# Altium PCB Yboard.pcbdoc (part 2 of 2)
Units mil, origin at the board's own origin, x right, y up, seen from the top; angles counter-clockwise.
Board outline 6804.08 x 4580.91 mil, 2 copper layers (Top Layer, Bottom Layer); 74 components, 99 nets, 390 pads, 148 vias.
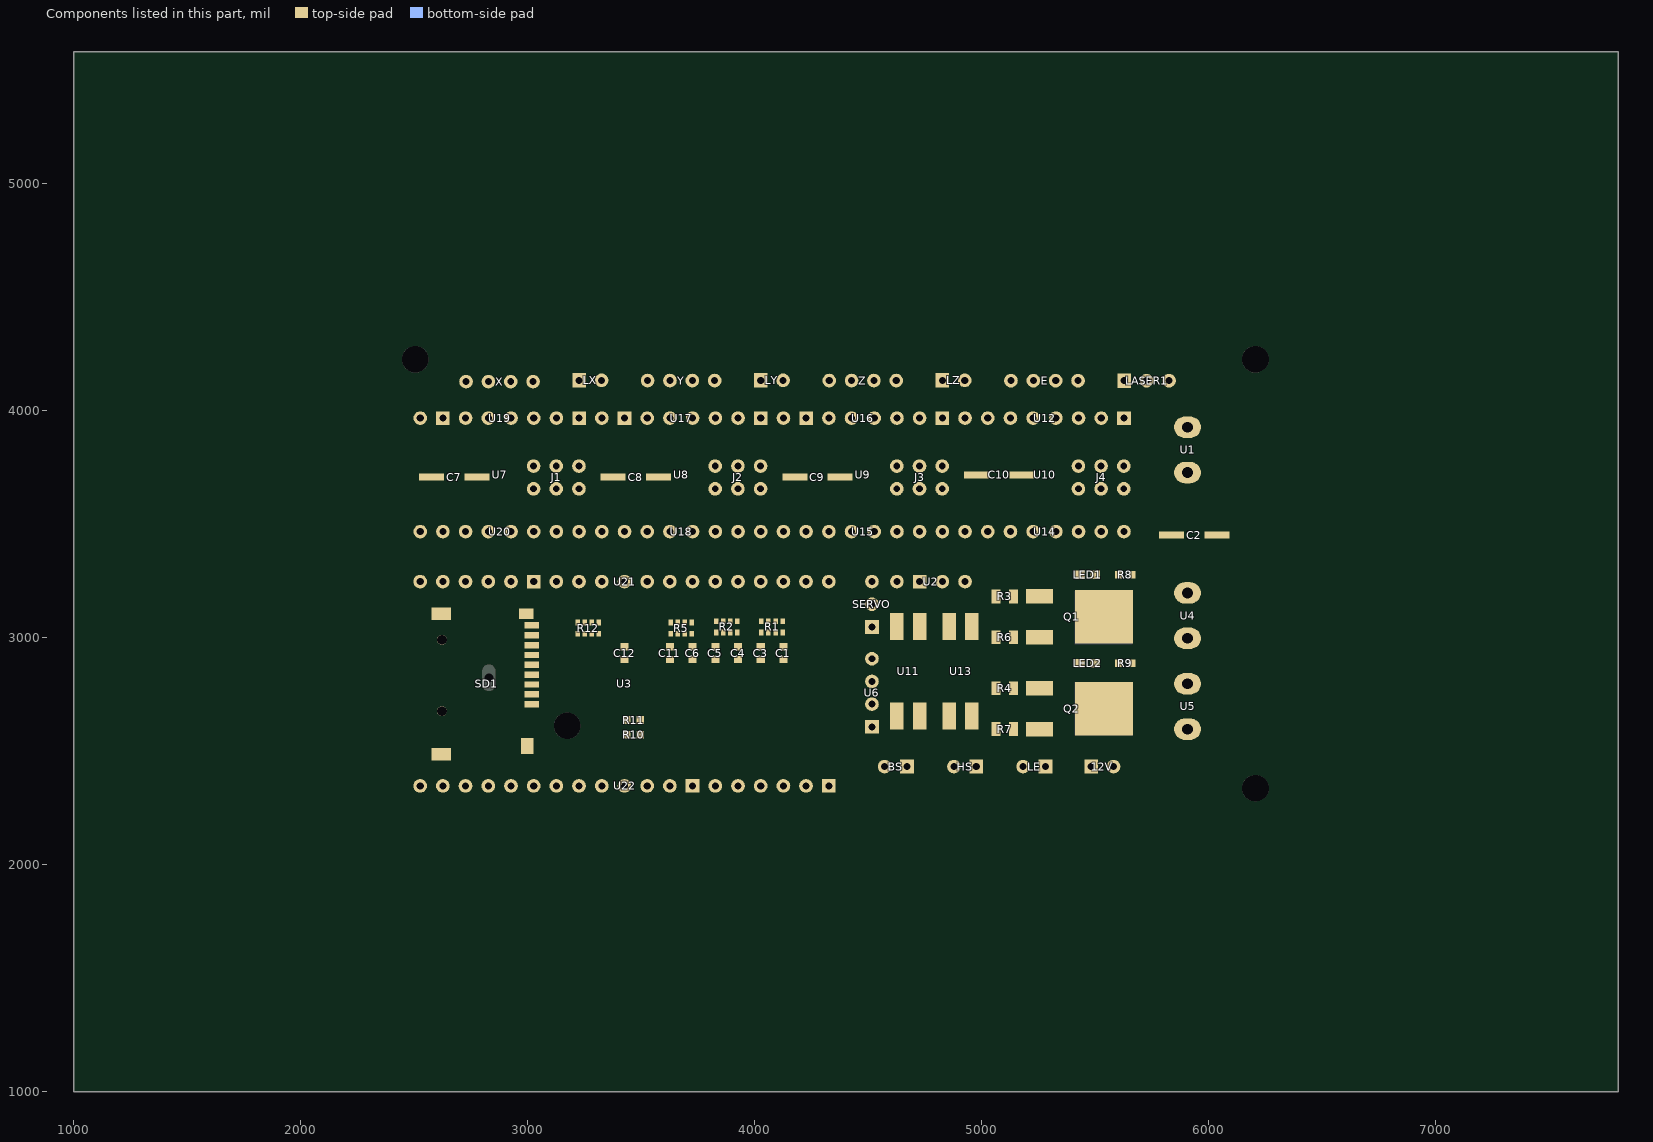
[diagram p2: the components of this part, seen from the top]

## Other copper
Top Layer:
  region net +12V: 5947.01,3159.31 5947.01,3234.31 5992.01,3211.81 5992.01,3181.81
  region net 3V3: 3229.31,3079.31 3229.31,3054.31 3244.31,3061.81 3244.31,3071.81
  region net 3V3: 3260.31,3079.31 3260.31,3054.31 3275.31,3061.81 3275.31,3071.81
  region net 3V3: 3240.61,3054.31 3240.61,3079.31 3225.61,3071.81 3225.61,3061.81
  region net 3V3: 3292.31,3079.31 3292.31,3054.31 3307.31,3061.81 3307.31,3071.81
  region net 3V3: 3272.61,3054.31 3272.61,3079.31 3257.61,3071.81 3257.61,3061.81
  region net 3V3: 3323.31,3079.31 3323.31,3054.31 3338.31,3061.81 3338.31,3071.81
  region net 3V3: 3303.61,3054.31 3303.61,3079.31 3288.61,3071.81 3288.61,3061.81
  region net ST_EN: 3323.31,3004.01 3303.61,3004.01 3308.43,2989.01 3318.43,2989.01
  region net SD_CS: 3292.31,3004.01 3272.61,3004.01 3277.43,2989.01 3287.43,2989.01
  region net MOSI: 3260.31,3004.01 3240.61,3004.01 3245.43,2989.01 3255.43,2989.01
  region net MISO: 3229.31,3004.01 3209.61,3004.01 3214.43,2989.81 3224.43,2989.81
  region net 3V3: 3408.74,2946.91 3408.74,2971.91 3393.74,2964.41 3393.74,2954.41
  region net 3V3: 3408.74,2946.91 3408.74,2971.91 3393.74,2964.41 3393.74,2954.41
  region net 3V3: 3413.93,2975.12 3438.93,2975.12 3431.43,2990.12 3421.43,2990.12
  region net LE_2: 3613.93,2975.12 3638.93,2975.12 3631.43,2990.12 3621.43,2990.12
  region net C6_2: 3713.93,2975.12 3738.93,2975.12 3731.43,2990.12 3721.43,2990.12
  region net C5_2: 3813.93,2975.12 3838.93,2975.12 3831.43,2990.12 3821.43,2990.12
  region net C4_2: 3913.93,2975.12 3938.93,2975.12 3931.43,2990.12 3921.43,2990.12
  region net C3_2: 4013.93,2975.12 4038.93,2975.12 4031.43,2990.12 4021.43,2990.12
  region net C1_2: 4113.93,2975.12 4138.93,2975.12 4131.43,2990.12 4121.43,2990.12
  region net R9_1: 5586.47,2903.82 5586.47,2869.8 5539.23,2871.06 5539.23,2902.56
  region net +12V: 5677.54,2869.8 5645.78,2869.8 5645.88,2866.81 5677.38,2866.81
  region net R8_1: 5586.47,3293.82 5586.47,3259.8 5539.23,3261.06 5539.23,3292.56
  region net +12V: 5677.54,3293.82 5677.54,3259.8 5724.78,3261.06 5724.78,3292.56
  region net U5_1: 5454.46,2867.31 5411.46,2867.31 5417.18,2820.07 5448.68,2820.07
  region net R9_1: 5521.46,2906.31 5521.46,2867.31 5568.7,2871.06 5568.7,2902.56
  region net U4_1: 5454.46,3257.31 5411.46,3257.31 5417.18,3210.07 5448.68,3210.07
  region net R8_1: 5521.46,3296.31 5521.46,3257.31 5568.7,3261.06 5568.7,3292.56
  region net HEATER_MOSFET: 5049.63,2807.32 5074.63,2807.32 5067.13,2822.32 5057.13,2822.32
  region net HEATER_MOSFET: 5074.63,2746.3 5049.63,2746.3 5057.13,2731.3 5067.13,2731.3
  region net R4_2: 5160.51,2789.31 5160.51,2764.31 5175.51,2771.81 5175.51,2781.81
  region net HOTBED_MOSFET: 5073.93,3151.3 5048.93,3151.3 5056.43,3136.3 5066.43,3136.3
  region net HOTBED_MOSFET: 5048.93,3212.32 5073.93,3212.32 5066.43,3227.32 5056.43,3227.32
  region net HOTBED_MOSFET: 5049.63,3212.32 5074.63,3212.32 5067.13,3227.32 5057.13,3227.32
  region net HOTBED_MOSFET: 5074.63,3151.3 5049.63,3151.3 5057.13,3136.3 5067.13,3136.3
  region net R3_2: 5160.51,3194.31 5160.51,3169.31 5175.51,3176.81 5175.51,3186.81
  region net E_LIMIT: 3619.61,3079.61 3639.31,3079.61 3634.43,3094.61 3624.43,3094.61
  region net 3V3: 3670.31,3079.31 3670.31,3054.31 3685.31,3061.81 3685.31,3071.81
  region net 3V3: 3682.61,3054.31 3682.61,3079.31 3667.61,3071.81 3667.61,3061.81
  region net Z_LIMIT: 3713.61,3079.61 3733.31,3079.61 3730.83,3094.61 3720.83,3094.61
  region net C6_2: 3733.31,3004.01 3713.93,3004.01 3721.43,2989.01 3731.43,2989.01
  region net C6_2: 3713.61,3004.31 3713.61,3029.31 3698.61,3021.81 3698.61,3011.81
  region net C6_2: 3702.31,3029.31 3702.31,3004.31 3717.31,3011.81 3717.31,3021.81
  region net LE_2: 3650.61,3004.31 3650.61,3029.31 3635.61,3021.81 3635.61,3011.81
  region net LE_2: 3638.93,3004.01 3619.61,3004.01 3621.43,2989.01 3631.43,2989.01
  region net LE_2: 3639.31,3029.31 3639.31,3004.31 3654.31,3011.81 3654.31,3021.81
  region net Y_LIMIT: 3819.61,3084.61 3838.33,3084.61 3830.83,3099.61 3820.83,3099.61
  region net 3V3: 3870.31,3084.31 3870.31,3059.31 3885.31,3066.81 3885.31,3076.81
  region net 3V3: 3882.61,3059.31 3882.61,3084.31 3867.61,3076.81 3867.61,3066.81
  region net X_LIMIT: 3913.61,3084.61 3933.31,3084.61 3930.83,3099.61 3920.83,3099.61
  region net C4_2: 3933.31,3009.01 3913.93,3009.01 3921.43,2994.01 3931.43,2994.01
  region net C4_2: 3913.61,3009.31 3913.61,3034.31 3898.61,3026.81 3898.61,3016.81
  region net C4_2: 3902.31,3034.31 3902.31,3009.31 3917.31,3016.81 3917.31,3026.81
  region net C5_2: 3850.61,3009.31 3850.61,3034.31 3835.61,3026.81 3835.61,3016.81
  region net C5_2: 3838.93,3009.01 3819.61,3009.01 3821.43,2994.01 3831.43,2994.01
  region net C5_2: 3839.31,3034.31 3839.31,3009.31 3854.31,3016.81 3854.31,3026.81
  region net C1_2: 4133.31,3009.01 4113.93,3009.01 4121.43,2994.01 4131.43,2994.01
  region net C1_2: 4113.61,3009.31 4113.61,3034.31 4098.61,3026.81 4098.61,3016.81
  region net C1_2: 4102.31,3034.31 4102.31,3009.31 4117.31,3016.81 4117.31,3026.81
  region net C3_2: 4050.61,3009.31 4050.61,3034.31 4035.61,3026.81 4035.61,3016.81
  region net C3_2: 4038.93,3009.01 4019.61,3009.01 4021.43,2994.01 4031.43,2994.01
  region net C3_2: 4039.31,3034.31 4039.31,3009.31 4054.31,3016.81 4054.31,3026.81
  region net HOTBED_SENSOR: 4019.61,3084.61 4039.31,3084.61 4034.43,3099.61 4024.43,3099.61
  region net 3V3: 4070.31,3084.31 4070.31,3059.31 4085.31,3066.81 4085.31,3076.81
  region net 3V3: 4082.61,3059.31 4082.61,3084.31 4067.61,3076.81 4067.61,3066.81
  region net HEATER_SENSOR: 4113.61,3084.61 4133.31,3084.61 4128.43,3099.61 4118.43,3099.61
  region net U5_1: 5410.91,2804.91 5472.3,2804.91 5448.68,2852.15 5417.18,2852.15
  region net R4_2: 5195,2764.31 5195,2789.31 5180,2781.81 5180,2771.81
  region net U4_1: 5410.91,3209.91 5472.3,3209.91 5448.68,3257.15 5417.18,3257.15
  region net R3_2: 5195,3169.31 5195,3194.31 5180,3186.81 5180,3176.81
  region net HEATER_MOSFET: 5049.63,2627.32 5074.63,2627.32 5067.13,2642.32 5057.13,2642.32
  region net HOTBED_MOSFET: 5049.63,3032.32 5074.63,3032.32 5067.13,3047.32 5057.13,3047.32
  region net MISO: 3049.02,2980.31 3049.02,2955.31 3064.02,2962.81 3064.02,2972.81
  region net SCK: 3049.02,2894.31 3049.02,2869.31 3064.02,2876.81 3064.02,2886.81
  region net 3V3: 2986.03,2825.31 2986.03,2850.31 2971.03,2842.81 2971.03,2832.81
  region net MOSI: 3049.02,2807.31 3049.02,2782.31 3064.02,2789.81 3064.02,2799.81
  region net SD_CS: 3049.02,2763.31 3049.02,2738.31 3064.02,2745.81 3064.02,2755.81
  region net SD_CS: 2986.03,2739.31 2986.03,2764.31 2971.03,2756.81 2971.03,2746.81
  region net +5V: 4599.96,3107.71 4649.96,3107.71 4634.17,3137.71 4614.16,3137.71
  region net HEATER_MOSFET: 4738.93,2989.61 4713.93,2989.61 4721.43,2974.61 4731.43,2974.61
  region net R11_1: 4638.93,2595.9 4613.93,2595.9 4621.43,2580.9 4631.43,2580.9
  region net +5V: 4831.43,3107.71 4881.43,3107.71 4866.43,3136.81 4846.43,3136.81
  region net HOTBED_MOSFET: 4985.98,3064.31 4985.98,3039.31 5000.98,3046.81 5000.98,3056.81
  region net R10_1: 4868.93,2595.9 4843.93,2595.9 4851.43,2580.9 4861.43,2580.9
  region net R11_1: 3511.99,2624.31 3511.99,2649.31 3526.99,2641.81 3526.99,2631.81
  region net HEATER: 3420.93,2624.31 3420.93,2649.31 3405.93,2641.81 3405.93,2631.81
  region net R10_1: 3511.96,2559.31 3511.96,2584.31 3526.96,2576.81 3526.96,2566.81
  region net HOTBED: 3420.9,2559.31 3420.9,2584.31 3405.9,2576.81 3405.9,2566.81
  region net 3V3: 3435.44,3113.86 3417.44,3113.89 3421.43,3105.48 3431.43,3105.47
  region net 3V3: 3344.4,3112.81 3344.4,3130.81 3352.8,3126.81 3352.8,3116.81
  region net LE_2: 4418.52,2597.81 4418.52,2615.81 4410.12,2611.81 4410.12,2601.81
  region net 3V3: 4340.36,2794.86 4322.36,2794.64 4321.26,2803.03 4341.26,2803.27
  region net 3V3: 4335.44,3128.99 4317.5,3130.46 4317.15,3138.91 4337.17,3137.28
  region net 3V3: 4335.62,3114.87 4317.72,3112.97 4317.57,3104.5 4337.54,3106.63
  region net C1_2: 4227.19,2769.83 4214.48,2782.58 4211.36,2773.81 4218.42,2766.73
  region net C3_2: 4218.52,2707.81 4218.52,2725.81 4210.12,2721.81 4210.12,2711.81
  region net MOSI: 3434.4,2457.81 3434.4,2475.81 3442.8,2471.81 3442.8,2461.81
  region net MOSI: 3099.43,2785.81 3099.43,2803.81 3107.83,2799.81 3107.83,2789.81
  region net MOSI: 3083.56,2785.81 3083.56,2803.81 3075.16,2799.81 3075.16,2789.81
  region net 3V3: 3667.46,3113.87 3685.46,3113.87 3681.46,3105.47 3671.46,3105.47
  region net 3V3: 3867.46,3113.87 3885.46,3113.87 3881.46,3105.47 3871.46,3105.47
  region net 3V3: 4085.51,3113.96 4067.51,3113.79 4071.59,3105.43 4081.59,3105.53
  region net MISO: 3099.4,2957.81 3099.4,2975.81 3107.8,2971.81 3107.8,2961.81
  region net MISO: 3084.09,2976.28 3082.98,2958.32 3074.84,2962.81 3075.46,2972.81
  region net SCK: 3083.52,2872.81 3083.52,2890.81 3075.12,2886.81 3075.12,2876.81
  region net SD_CS: 2964.4,2742.81 2964.4,2760.81 2972.8,2756.81 2972.8,2746.81
  region net 3V3: 2964.93,2828.32 2963.83,2846.28 2972.46,2842.81 2973.07,2832.81
  region net C6_2: 4923.2,4103.38 4955.07,4135.14 4957.5,4107.91 4950.42,4100.85
  region net C5_2: 4123.2,4103.38 4155.07,4135.14 4157.5,4107.91 4150.42,4100.85
  region net C4_2: 3323.2,4103.38 3355.07,4135.14 3357.5,4107.91 3350.42,4100.85
  region net 3V3: 5605.98,3732.81 5605.98,3777.81 5584.98,3760.31 5584.98,3750.31
  region net E_MS3: 5595.89,3657.19 5627.71,3625.37 5600.48,3622.9 5593.41,3629.97
  region net 3V3: 5545.67,3732.81 5545.67,3777.81 5566.67,3760.31 5566.67,3750.31
  region net 3V3: 5505.98,3732.81 5505.98,3777.81 5484.98,3760.31 5484.98,3750.31
  region net 3V3: 5548.33,3775.16 5503.33,3775.16 5520.83,3796.16 5530.83,3796.16
  region net E_MS2: 5495.89,3657.19 5527.71,3625.37 5500.48,3622.9 5493.41,3629.97
  region net 3V3: 5445.67,3732.81 5445.67,3777.81 5466.67,3760.31 5466.67,3750.31
  region net E_MS1: 5405.98,3632.81 5405.98,3677.81 5384.98,3660.31 5384.98,3650.31
  region net 3V3: 4805.98,3732.81 4805.98,3777.81 4784.98,3760.31 4784.98,3750.31
  region net Z_MS3: 4795.89,3657.19 4827.71,3625.37 4800.48,3622.9 4793.41,3629.97
  region net 3V3: 4745.67,3732.81 4745.67,3777.81 4766.67,3760.31 4766.67,3750.31
  region net 3V3: 4705.98,3732.81 4705.98,3777.81 4684.98,3760.31 4684.98,3750.31
  region net 3V3: 4748.33,3775.16 4703.33,3775.16 4720.83,3796.16 4730.83,3796.16
  region net Z_MS2: 4695.89,3657.19 4727.71,3625.37 4700.48,3622.9 4693.41,3629.97
  region net 3V3: 4645.67,3732.81 4645.67,3777.81 4666.67,3760.31 4666.67,3750.31
  region net Z_MS1: 4605.98,3632.81 4605.98,3677.81 4584.98,3660.31 4584.98,3650.31
  region net 3V3: 4005.98,3732.81 4005.98,3777.81 3984.98,3760.31 3984.98,3750.31
  region net Y_MS3: 3995.89,3657.19 4027.71,3625.37 4000.48,3622.9 3993.41,3629.97
  region net 3V3: 3945.67,3732.81 3945.67,3777.81 3966.67,3760.31 3966.67,3750.31
  region net 3V3: 3905.98,3732.81 3905.98,3777.81 3884.98,3760.31 3884.98,3750.31
  region net 3V3: 3948.33,3775.16 3903.33,3775.16 3920.83,3796.16 3930.83,3796.16
  region net Y_MS2: 3895.89,3657.19 3927.71,3625.37 3900.48,3622.9 3893.41,3629.97
  region net 3V3: 3845.67,3732.81 3845.67,3777.81 3866.67,3760.31 3866.67,3750.31
  region net Y_MS1: 3805.98,3632.81 3805.98,3677.81 3784.98,3660.31 3784.98,3650.31
  region net 3V3: 3205.98,3732.81 3205.98,3777.81 3184.98,3760.31 3184.98,3750.31
  region net X_MS3: 3195.89,3657.19 3227.71,3625.37 3200.48,3622.9 3193.41,3629.97
  region net 3V3: 3145.67,3732.81 3145.67,3777.81 3166.67,3760.31 3166.67,3750.31
  region net 3V3: 3105.98,3732.81 3105.98,3777.81 3084.98,3760.31 3084.98,3750.31
  region net 3V3: 3148.33,3775.16 3103.33,3775.16 3120.83,3796.16 3130.83,3796.16
  region net X_MS2: 3095.89,3657.19 3127.71,3625.37 3100.48,3622.9 3093.41,3629.97
  region net 3V3: 3045.67,3732.81 3045.67,3777.81 3066.67,3760.31 3066.67,3750.31
  region net X_MS1: 3005.98,3632.81 3005.98,3677.81 2984.98,3660.31 2984.98,3650.31
  region net MOSI: 4248.33,2366.66 4203.33,2366.66 4220.83,2387.66 4230.83,2387.66
  region net HOTBED: 3148.33,2366.66 3103.33,2366.66 3120.83,2387.66 3130.83,2387.66
  region net HEATER: 2948.33,2366.66 2903.33,2366.66 2920.83,2387.66 2930.83,2387.66
  region net ST_EN: 2848.33,2366.66 2803.33,2366.66 2820.83,2387.66 2830.83,2387.66
  region net ST_EN: 2848.62,2366.32 2803.62,2366.98 2821.43,2387.72 2831.43,2387.58
  region net E_LIMIT: 2948.33,3226.97 2903.33,3226.97 2920.83,3205.97 2930.83,3205.97
  region net X_STEP: 3148.33,3266.66 3103.33,3266.66 3120.83,3287.66 3130.83,3287.66
  region net X_DIR: 3248.33,3266.66 3203.33,3266.66 3220.83,3287.66 3230.83,3287.66
  region net Y_STEP: 3348.33,3266.66 3303.33,3266.66 3320.83,3287.66 3330.83,3287.66
  region net Y_DIR: 3448.33,3266.66 3403.33,3266.66 3420.83,3287.66 3430.83,3287.66
  region net Z_STEP: 3548.33,3266.66 3503.33,3266.66 3520.83,3287.66 3530.83,3287.66
  region net Z_DIR: 3648.33,3266.66 3603.33,3266.66 3620.83,3287.66 3630.83,3287.66
  region net Z_LIMIT: 3748.33,3226.97 3703.33,3226.97 3720.83,3205.97 3730.83,3205.97
  region net Y_LIMIT: 3848.33,3226.97 3803.33,3226.97 3820.83,3205.97 3830.83,3205.97
  region net X_LIMIT: 3948.33,3226.97 3903.33,3226.97 3920.83,3205.97 3930.83,3205.97
  region net HOTBED_SENSOR: 4005.16,3225.06 4049.99,3229.03 4034.43,3206.57 4024.43,3205.69
  region net HEATER_SENSOR: 4147.12,3225.68 4102.2,3228.33 4118.43,3206.33 4128.43,3205.74
  region net 3V3: 4348.57,3227.25 4303.57,3226.7 4316.33,3205.85 4336.33,3206.09
  region net Z_MS1: 4225.03,3496.78 4256.37,3464.48 4259.25,3491.67 4252.29,3498.84
  region net Z_MS2: 4325.03,3496.78 4356.37,3464.48 4359.25,3491.67 4352.29,3498.84
  region net Z_MS3: 4425.03,3496.78 4456.37,3464.48 4459.25,3491.67 4452.29,3498.84
  region net Z_SLEEP: 4547.11,3488.57 4545.46,3443.6 4567.09,3460.31 4567.46,3470.31
  region net Z_SLEEP: 4607.45,3443.6 4605.8,3488.57 4585.46,3470.31 4585.83,3460.31
  region net Z_STEP: 4696.49,3468.24 4728.79,3436.9 4701.6,3434.02 4694.43,3440.98
  region net Z_DIR: 4796.49,3468.24 4828.79,3436.9 4801.6,3434.02 4794.43,3440.98
  region net 3V3: 4748.65,3946.62 4703.65,3947.32 4720.83,3926.05 4730.83,3925.9
  region net +12V: 4106.26,3944.63 4150.99,3949.55 4145.93,3927.86 4115.93,3924.56
  region net Y_MS1: 3425.03,3496.78 3456.37,3464.48 3459.25,3491.67 3452.29,3498.84
  region net Y_MS2: 3525.03,3496.78 3556.37,3464.48 3559.25,3491.67 3552.29,3498.84
  region net Y_MS3: 3625.03,3496.78 3656.37,3464.48 3659.25,3491.67 3652.29,3498.84
  region net Y_RESET: 3747.11,3488.57 3745.46,3443.6 3767.09,3460.31 3767.46,3470.31
  region net Y_RESET: 3807.45,3443.6 3805.8,3488.57 3785.46,3470.31 3785.83,3460.31
  region net Y_STEP: 3938.57,3439.37 3897.71,3458.22 3904.5,3431.96 3914.18,3427.49
  region net Y_DIR: 3996.49,3468.24 4028.79,3436.9 4001.6,3434.02 3994.43,3440.98
  region net 3V3: 3948.65,3946.62 3903.65,3947.32 3920.83,3926.05 3930.83,3925.9
  region net +12V: 3306.26,3944.63 3350.99,3949.55 3345.93,3927.86 3315.93,3924.56
  region net ST_EN: 2496.49,3468.24 2528.79,3436.9 2501.6,3434.02 2494.43,3440.98
  region net X_MS1: 2625.03,3496.78 2656.37,3464.48 2659.25,3491.67 2652.29,3498.84
  region net X_MS2: 2725.03,3496.78 2756.37,3464.48 2759.25,3491.67 2752.29,3498.84
  region net X_MS3: 2825.03,3496.78 2856.37,3464.48 2859.25,3491.67 2852.29,3498.84
  region net X_SLEEP: 2947.11,3488.57 2945.46,3443.6 2967.09,3460.31 2967.46,3470.31
  region net X_SLEEP: 3007.45,3443.6 3005.8,3488.57 2985.46,3470.31 2985.83,3460.31
  region net X_STEP: 3148.65,3446.62 3103.65,3447.32 3120.83,3426.05 3130.83,3425.9
  region net X_DIR: 3248.65,3446.62 3203.65,3447.32 3220.83,3426.05 3230.83,3425.9
  region net 3V3: 3148.65,3946.62 3103.65,3947.32 3120.83,3926.05 3130.83,3925.9
  region net +12V: 2506.26,3944.63 2550.99,3949.55 2545.93,3927.87 2515.93,3924.56
  region net +12V: 5600.57,2409.31 5600.57,2454.31 5621.57,2446.81 5621.57,2416.81
  region net +5V: 4646.84,3224.83 4602.07,3229.3 4612.34,3207.17 4632.4,3205.17
  region net +5V: 4648.93,3226.97 4603.93,3226.97 4616.43,3205.97 4636.43,3205.97
  region net HOTBED_MOSFET: 4514.55,3276.75 4546.37,3244.93 4548.84,3272.16 4541.77,3279.23
  region net HOTBED_MOSFET: 5847.43,4111.97 5802.43,4111.97 5819.93,4090.97 5829.93,4090.97
  region net ST_EN: 2496.49,3468.24 2528.79,3436.9 2501.6,3434.02 2494.43,3440.98
  region net X_MS1: 2625.03,3496.78 2656.37,3464.48 2659.25,3491.67 2652.29,3498.84
  region net X_MS2: 2725.03,3496.78 2756.37,3464.48 2759.25,3491.67 2752.29,3498.84
  region net X_MS3: 2825.03,3496.78 2856.37,3464.48 2859.25,3491.67 2852.29,3498.84
  region net X_SLEEP: 2947.11,3488.57 2945.46,3443.6 2967.09,3460.31 2967.46,3470.31
  region net X_SLEEP: 3007.45,3443.6 3005.8,3488.57 2985.46,3470.31 2985.83,3460.31
  region net X_STEP: 3148.65,3446.62 3103.65,3447.32 3120.83,3426.05 3130.83,3425.9
  region net X_DIR: 3248.65,3446.62 3203.65,3447.32 3220.83,3426.05 3230.83,3425.9
  region net +12V: 2506.26,3944.63 2550.99,3949.55 2545.93,3927.87 2515.93,3924.56
  region net 3V3: 3148.65,3946.62 3103.65,3947.32 3120.83,3926.05 3130.83,3925.9
  region net Y_MS1: 3425.03,3496.78 3456.37,3464.48 3459.25,3491.67 3452.29,3498.84
  region net Y_MS2: 3525.03,3496.78 3556.37,3464.48 3559.25,3491.67 3552.29,3498.84
  region net Y_MS3: 3625.03,3496.78 3656.37,3464.48 3659.25,3491.67 3652.29,3498.84
  region net Y_RESET: 3747.11,3488.57 3745.46,3443.6 3767.09,3460.31 3767.46,3470.31
  region net Y_RESET: 3807.45,3443.6 3805.8,3488.57 3785.46,3470.31 3785.83,3460.31
  region net Y_STEP: 3938.57,3439.37 3897.71,3458.22 3904.5,3431.96 3914.18,3427.49
  region net Y_DIR: 3996.49,3468.24 4028.79,3436.9 4001.6,3434.02 3994.43,3440.98
  region net +12V: 3306.26,3944.63 3350.99,3949.55 3345.93,3927.86 3315.93,3924.56
  region net 3V3: 3948.65,3946.62 3903.65,3947.32 3920.83,3926.05 3930.83,3925.9
  region net +12V: 4106.26,3944.63 4150.99,3949.55 4145.93,3927.86 4115.93,3924.56
  region net 3V3: 4748.65,3946.62 4703.65,3947.32 4720.83,3926.05 4730.83,3925.9
  region net Z_MS1: 4225.03,3496.78 4256.37,3464.48 4259.25,3491.67 4252.29,3498.84
  region net Z_MS2: 4325.03,3496.78 4356.37,3464.48 4359.25,3491.67 4352.29,3498.84
  region net Z_MS3: 4425.03,3496.78 4456.37,3464.48 4459.25,3491.67 4452.29,3498.84
  region net Z_SLEEP: 4547.11,3488.57 4545.46,3443.6 4567.09,3460.31 4567.46,3470.31
  region net Z_SLEEP: 4607.45,3443.6 4605.8,3488.57 4585.46,3470.31 4585.83,3460.31
  region net Z_STEP: 4696.49,3468.24 4728.79,3436.9 4701.6,3434.02 4694.43,3440.98
  region net Z_DIR: 4796.49,3468.24 4828.79,3436.9 4801.6,3434.02 4794.43,3440.98
  region net E_MS1: 5025.03,3496.78 5056.37,3464.48 5059.25,3491.67 5052.29,3498.84
  region net E_MS2: 5125.03,3496.78 5156.37,3464.48 5159.25,3491.67 5152.29,3498.84
  region net E_MS3: 5225.03,3496.78 5256.37,3464.48 5259.25,3491.67 5252.29,3498.84
  region net E_SLEEP: 5347.11,3488.57 5345.46,3443.6 5367.09,3460.31 5367.46,3470.31
  region net E_SLEEP: 5407.45,3443.6 5405.8,3488.57 5385.46,3470.31 5385.83,3460.31
  region net +12V: 4906.26,3944.63 4950.99,3949.55 4945.93,3927.86 4915.93,3924.56
  region net 3V3: 5548.65,3946.62 5503.65,3947.32 5520.83,3926.05 5530.83,3925.9
  region net E_MS1: 5025.03,3496.78 5056.37,3464.48 5059.25,3491.67 5052.29,3498.84
  region net E_MS2: 5125.03,3496.78 5156.37,3464.48 5159.25,3491.67 5152.29,3498.84
  region net E_MS3: 5225.03,3496.78 5256.37,3464.48 5259.25,3491.67 5252.29,3498.84
  region net E_SLEEP: 5347.11,3488.57 5345.46,3443.6 5367.09,3460.31 5367.46,3470.31
  region net E_SLEEP: 5407.45,3443.6 5405.8,3488.57 5385.46,3470.31 5385.83,3460.31
  region net 3V3: 5548.65,3946.62 5503.65,3947.32 5520.83,3926.05 5530.83,3925.9
  region net +12V: 4906.26,3944.63 4950.99,3949.55 4945.93,3927.86 4915.93,3924.56
  region net MOSI: 4248.65,2367 4203.65,2366.31 4220.83,2387.57 4230.83,2387.73
  region net HOTBED: 3148.65,2367 3103.65,2366.31 3120.83,2387.57 3130.83,2387.73
  region net HEATER: 2948.65,2367 2903.65,2366.31 2920.83,2387.57 2930.83,2387.73
  region net ST_EN: 2848.65,2367 2803.65,2366.31 2820.83,2387.57 2830.83,2387.73
  region net ST_EN: 2848.94,2366.67 2803.94,2366.64 2821.43,2387.65 2831.43,2387.66
  region net 3V3: 4348.89,3226.9 4303.89,3227.04 4316.33,3206 4336.33,3205.94
  region net HEATER_SENSOR: 4147.42,3225.35 4102.55,3228.69 4118.43,3206.45 4128.43,3205.71
  region net HOTBED_SENSOR: 4005.46,3225.39 4050.34,3228.66 4034.43,3206.44 4024.43,3205.71
  region net X_LIMIT: 3948.65,3226.62 3903.65,3227.32 3920.83,3206.05 3930.83,3205.9
  region net Y_LIMIT: 3848.65,3226.62 3803.65,3227.32 3820.83,3206.05 3830.83,3205.9
  region net Z_LIMIT: 3748.65,3226.62 3703.65,3227.32 3720.83,3206.05 3730.83,3205.9
  region net Z_DIR: 3648.65,3267 3603.65,3266.31 3620.83,3287.57 3630.83,3287.73
  region net Z_STEP: 3548.65,3267 3503.65,3266.31 3520.83,3287.57 3530.83,3287.73
  region net Y_DIR: 3448.65,3267 3403.65,3266.31 3420.83,3287.57 3430.83,3287.73
  region net Y_STEP: 3348.65,3267 3303.65,3266.31 3320.83,3287.57 3330.83,3287.73
  region net X_DIR: 3248.65,3267 3203.65,3266.31 3220.83,3287.57 3230.83,3287.73
  region net X_STEP: 3148.65,3267 3103.65,3266.31 3120.83,3287.57 3130.83,3287.73
  region net E_LIMIT: 2948.65,3226.62 2903.65,3227.32 2920.83,3206.05 2930.83,3205.9
  region net +12V: 5766.46,3376.81 5686.46,3296.81 5686.46,3128.07 5696.46,3118.07 5986.46,3118.07 6006.46,3098.07 6006.46,2938.07 5986.46,2918.07 5836.46,2918.07 5686.46,2918.07 5686.46,2728.07 5696.46,2718.07 6136.46,2718.07 6156.46,2738.07 6156.46,3386.81 6136.46,3406.81 5976.46,3408.07 5966.46,3418.07 5966.46,3598.07 5996.46,3628.07 5996.46,3828.07 5766.46,3828.07 5766.46,3516.81
  region net U4_1: 5406.46,2928.07 5976.46,2928.07 5996.46,2948.07 5996.46,3086.81 5976.46,3108.07 5676.46,3108.07 5666.46,3116.81 5666.46,3206.81 5406.46,3206.81
  region net U5_1: 5406.46,2526.81 5416.46,2526.81 5976.46,2526.81 5996.46,2546.81 5996.46,2686.81 5976.46,2706.81 5676.46,2706.81 5666.46,2716.81 5666.46,2806.81 5666.46,2826.81 5406.46,2826.81
Bottom Layer:
  region net +12V: 5894.65,3149.57 5894.65,3244.06 5807.33,3226.81 5807.33,3166.81
  region net +12V: 5894.65,3149.57 5918.27,3244.06 5852.49,3307.32 5789.64,3257.03
  region net +12V: 5894.65,3244.06 5918.27,3244.06 5946.43,3364.06 5866.43,3364.06
  region net +12V: 5894.62,3679.57 5918.24,3774.06 5860.84,3814.83 5808.6,3782.21
  region net +12V: 5918.24,3679.57 5894.62,3679.57 5866.43,3559.57 5946.43,3559.57
  region net 3V3: 3434.4,3112.81 3434.4,3130.81 3442.8,3131.81 3442.8,3111.81
  region net 3V3: 3328.52,3112.81 3328.52,3130.81 3320.12,3126.81 3320.12,3116.81
  region net LE_2: 4435.44,2598.86 4417.44,2598.89 4421.43,2590.48 4431.43,2590.47
  region net 3V3: 4343.44,2787.55 4330.69,2774.84 4339.46,2771.71 4346.54,2778.78
  region net 3V3: 4317.89,3112.81 4317.89,3130.81 4309.49,3131.81 4309.49,3111.81
  region net C1_2: 4234.4,2772.81 4234.4,2790.81 4242.8,2786.81 4242.8,2776.81
  region net C3_2: 4234.4,2707.81 4234.4,2725.81 4242.8,2721.81 4242.8,2711.81
  region net MOSI: 3417.46,2474.75 3435.46,2474.75 3431.46,2483.15 3421.46,2483.15
  region net MOSI: 3099.43,2785.81 3099.43,2803.81 3107.83,2799.81 3107.83,2789.81
  region net 3V3: 3684.4,3112.81 3684.4,3130.81 3692.8,3131.81 3692.8,3111.81
  region net 3V3: 3668.52,3112.81 3668.52,3130.81 3660.12,3131.81 3660.12,3111.81
  region net 3V3: 3884.4,3112.81 3884.4,3130.81 3892.8,3131.81 3892.8,3111.81
  region net 3V3: 3868.52,3112.81 3868.52,3130.81 3860.12,3131.81 3860.12,3111.81
  region net 3V3: 4084.37,3112.81 4084.37,3130.81 4092.77,3131.81 4092.77,3111.81
  region net 3V3: 4068.49,3112.81 4068.49,3130.81 4060.09,3131.81 4060.09,3111.81
  region net MISO: 3099.4,2957.81 3099.4,2975.81 3107.8,2971.81 3107.8,2961.81
  region net SCK: 3099.4,2872.81 3099.4,2890.81 3107.8,2886.81 3107.8,2876.81
  region net SD_CS: 2954.95,2739.91 2944.83,2754.8 2940.08,2746.84 2945.81,2738.42
  region net 3V3: 2957.19,2848.79 2944.48,2836.05 2941.36,2844.81 2948.42,2851.89
  region net LE_2: 5152.29,2429.93 5184.11,2461.75 5156.88,2464.23 5149.81,2457.16
  region net C1_2: 4847.29,2429.93 4879.11,2461.75 4851.88,2464.23 4844.81,2457.16
  region net C3_2: 4542.29,2429.93 4574.11,2461.75 4546.88,2464.23 4539.81,2457.16
  region net 3V3: 5623.95,3725.37 5655.77,3757.19 5658.24,3729.97 5651.17,3722.9
  region net 3V3: 5605.98,3732.81 5605.98,3777.81 5584.98,3760.31 5584.98,3750.31
  region net 3V3: 5545.67,3732.81 5545.67,3777.81 5566.67,3760.31 5566.67,3750.31
  region net 3V3: 5505.98,3732.81 5505.98,3777.81 5484.98,3760.31 5484.98,3750.31
  region net 3V3: 5445.67,3732.81 5445.67,3777.81 5466.67,3760.31 5466.67,3750.31
  region net 3V3: 5405.98,3732.81 5405.98,3777.81 5384.98,3760.31 5384.98,3750.31
  region net 3V3: 4845.67,3732.81 4845.67,3777.81 4866.67,3760.31 4866.67,3750.31
  region net 3V3: 4805.98,3732.81 4805.98,3777.81 4784.98,3760.31 4784.98,3750.31
  region net 3V3: 4745.67,3732.81 4745.67,3777.81 4766.67,3760.31 4766.67,3750.31
  region net 3V3: 4705.98,3732.81 4705.98,3777.81 4684.98,3760.31 4684.98,3750.31
  region net 3V3: 4645.67,3732.81 4645.67,3777.81 4666.67,3760.31 4666.67,3750.31
  region net 3V3: 4605.98,3732.81 4605.98,3777.81 4584.98,3760.31 4584.98,3750.31
  region net 3V3: 4045.67,3732.81 4045.67,3777.81 4066.67,3760.31 4066.67,3750.31
  region net 3V3: 4005.98,3732.81 4005.98,3777.81 3984.98,3760.31 3984.98,3750.31
  region net 3V3: 3945.67,3732.81 3945.67,3777.81 3966.67,3760.31 3966.67,3750.31
  region net 3V3: 3905.98,3732.81 3905.98,3777.81 3884.98,3760.31 3884.98,3750.31
  region net 3V3: 3845.67,3732.81 3845.67,3777.81 3866.67,3760.31 3866.67,3750.31
  region net 3V3: 3805.98,3732.81 3805.98,3777.81 3784.98,3760.31 3784.98,3750.31
  region net 3V3: 3245.67,3732.81 3245.67,3777.81 3266.67,3760.31 3266.67,3750.31
  region net 3V3: 3205.98,3732.81 3205.98,3777.81 3184.98,3760.31 3184.98,3750.31
  region net 3V3: 3145.67,3732.81 3145.67,3777.81 3166.67,3760.31 3166.67,3750.31
  region net 3V3: 3105.98,3732.81 3105.98,3777.81 3084.98,3760.31 3084.98,3750.31
  region net 3V3: 3045.67,3732.81 3045.67,3777.81 3066.67,3760.31 3066.67,3750.31
  region net SCL: 4148.33,2366.66 4103.33,2366.66 4120.83,2387.66 4130.83,2387.66
  region net SDA: 3848.33,2366.66 3803.33,2366.66 3820.83,2387.66 3830.83,2387.66
  region net MISO: 3648.33,2366.66 3603.33,2366.66 3620.83,2387.66 3630.83,2387.66
  region net SCK: 3548.33,2366.66 3503.33,2366.66 3520.83,2387.66 3530.83,2387.66
  region net SD_CS: 3395.89,2344.93 3427.71,2376.75 3400.48,2379.23 3393.41,2372.16
  region net E_DIR: 3295.87,2345.27 3328.04,2376.73 3300.85,2379.51 3293.7,2372.52
  region net E_STEP: 3248.33,2366.66 3203.33,2366.66 3220.83,2384.79 3230.83,2384.79
  region net +5V: 2523.95,3216.87 2555.77,3248.69 2561.78,3225 2547.64,3210.86
  region net 3V3: 4323.95,3276.75 4355.77,3244.93 4358.24,3272.16 4351.17,3279.23
  region net SDA: 4496.61,2884.31 4496.61,2929.31 4475.61,2911.81 4475.61,2901.81
  region net SCL: 4512.02,2836.48 4487.58,2798.7 4479.45,2824.79 4484.88,2833.19
  region net 3V3: 4496.61,2684.31 4496.61,2729.31 4475.61,2711.81 4475.61,2701.81
  region net ST_EN: 4148.65,3487 4103.65,3486.31 4120.83,3507.57 4130.83,3507.73
  region net ST_EN: 4148.65,3487 4103.65,3486.31 4120.83,3507.57 4130.83,3507.73
  region net ST_EN: 3348.65,3487 3303.65,3486.31 3320.83,3507.57 3330.83,3507.73
  region net ST_EN: 3348.65,3487 3303.65,3486.31 3320.83,3507.57 3330.83,3507.73
  region net ST_EN: 2525.03,3496.78 2556.37,3464.48 2559.25,3491.67 2552.29,3498.84
  region net +5V: 4596.49,3248.69 4628.31,3216.87 4604.62,3210.86 4590.48,3225
  region net +5V: 4596.49,3248.69 4628.31,3216.87 4604.62,3210.86 4590.48,3225
  region net +5V: 4545.59,3139.78 4519.76,3176.63 4544.04,3178.57 4555.7,3161.94
  region net ST_EN: 2525.03,3496.78 2556.37,3464.48 2559.25,3491.67 2552.29,3498.84
  region net ST_EN: 3348.65,3487 3303.65,3486.31 3320.83,3507.57 3330.83,3507.73
  region net ST_EN: 3348.65,3487 3303.65,3486.31 3320.83,3507.57 3330.83,3507.73
  region net ST_EN: 4148.65,3487 4103.65,3486.31 4120.83,3507.57 4130.83,3507.73
  region net ST_EN: 4148.65,3487 4103.65,3486.31 4120.83,3507.57 4130.83,3507.73
  region net ST_EN: 4896.61,3463.83 4927.23,3496.8 4899.94,3498.27 4893.13,3490.94
  region net E_STEP: 5548.65,3446.62 5503.65,3447.32 5520.83,3426.05 5530.83,3425.9
  region net E_DIR: 5648.65,3446.62 5603.65,3447.32 5620.83,3426.05 5630.83,3425.9
  region net ST_EN: 4896.61,3463.83 4927.23,3496.8 4899.94,3498.27 4893.13,3490.94
  region net E_STEP: 5548.65,3446.62 5503.65,3447.32 5520.83,3426.05 5530.83,3425.9
  region net E_DIR: 5648.65,3446.62 5603.65,3447.32 5620.83,3426.05 5630.83,3425.9
  region net SCL: 4148.65,2367 4103.65,2366.31 4120.83,2387.57 4130.83,2387.73
  region net SDA: 3848.65,2367 3803.65,2366.31 3820.83,2387.57 3830.83,2387.73
  region net MISO: 3648.65,2367 3603.65,2366.31 3620.83,2387.57 3630.83,2387.73
  region net SCK: 3548.65,2367 3503.65,2366.31 3520.83,2387.57 3530.83,2387.73
  region net SD_CS: 3396.54,2344.61 3428.01,2376.77 3400.76,2378.95 3393.77,2371.8
  region net E_DIR: 3296.52,2344.94 3328.35,2376.75 3301.12,2379.24 3294.05,2372.17
  region net E_STEP: 3248.63,2367.03 3203.63,2366.28 3220.83,2384.71 3230.83,2384.88
  region net 3V3: 4324.25,3276.73 4356.42,3245.26 4358.6,3272.51 4351.45,3279.5
  region net +5V: 2524.25,3216.89 2556.42,3248.36 2562.17,3224.61 2547.87,3210.62
  region net U5_1: 5406.46,2526.81 5416.46,2518.07 5966.46,2518.07 5996.46,2546.81 5996.46,2686.81 5976.46,2706.81 5676.46,2706.81 5666.46,2716.81 5666.46,2806.81 5666.46,2826.81 5406.46,2826.81
  region net U4_1: 5406.46,2918.07 5976.46,2918.07 5996.46,2938.07 5996.46,3086.81 5976.46,3106.81 5676.46,3106.81 5666.46,3116.81 5666.46,3206.81 5406.46,3206.81
  region net +12V: 5716.46,3386.81 5641.46,3311.81 5416.46,3313.07 5416.46,3228.07 5676.46,3228.07 5676.46,3128.07 5686.46,3118.07 5986.46,3118.07 6006.46,3098.07 6006.46,2928.07 5986.46,2908.07 5686.46,2908.07 5686.46,2728.07 5696.46,2718.07 6136.46,2718.07 6156.46,2738.07 6156.46,3386.81 6136.46,3406.81 6016.46,3408.07 5996.46,3428.07 5996.46,3808.07 5976.46,3828.07 5716.46,3826.81

## Silkscreen, mask and mechanical layers (free items; w line width, h text height)
Top Overlay:
  text "Yboard V4.5" at 5747.57,2341.81 h60
Bottom Overlay:
  text "SVG" at 5691.46,4191.81 h60
  text "GVS" at 4396.46,3156.81 h60 r270
  text "5V" at 4661.46,3141.81 h60
  text "YF-STUDIO" at 4736.46,3008.07 h60 r90
Document:
  lines w10 net S$83890: 2031.46,2783.07 2561.46,2783.07
  lines w10 net S$83892: 2036.46,3243.07 2236.46,3243.07 2406.46,3073.07 2526.46,3073.07
  lines w10 net S$83894: 2016.46,3808.07 5476.46,3808.07
  lines w10 net S$83896: 2076.46,4193.07 2826.46,4193.07
  lines w10 net S$83900: 3641.46,4213.07 3641.46,4613.07
  lines w10 net S$83902: 4086.46,4213.07 4086.46,4623.07
  lines w10 net S$83904: 4496.46,4183.07 4496.46,4633.07
  lines w10 net S$83906: 4851.46,4208.07 4851.46,4608.07
  lines w10 net S$83908: 5306.46,4203.07 5306.46,4628.07
  lines w10 net S$83912: 3261.46,4188.07 3261.46,4613.07
  lines w10 net S$83914: 5741.46,4213.07 6746.46,4213.07
  lines w10 net S$83916: 5906.46,3843.07 6756.46,3843.07
  lines w10 net S$83918: 5931.46,3103.07 6761.46,3103.07
  lines w10 net S$83920: 5946.46,2718.07 6761.46,2718.07
  lines w10 net S$83922: 4621.46,1908.07 4621.46,2343.07
  lines w10 net S$83924: 4921.46,1908.07 4921.46,2393.07
  lines w10 net S$83926: 5221.46,1908.07 5221.46,2348.07
  lines w10 net S$83928: 5526.46,1908.07 5526.46,2363.07
  lines w10 net S$83930: 4046.46,1908.07 4046.46,2608.07 4226.46,2788.07 4461.46,2788.07
  lines w10 net S$83932: 3641.46,1908.07 3641.46,2948.07 3821.46,3128.07 4516.46,3128.07
  lines w10 net S$83934: 3321.46,1908.07 3321.46,3138.07 3431.46,3248.07 4761.46,3248.07
  text "Z轴" at 4406.46,4683.07 h80 r359
  text "Z限位" at 4756.46,4683.17 h80 r1
  text "E轴" at 5246.46,4683.07 h80
  text "X限位" at 3156.46,4678.07 h80 r1
  text "Y轴" at 3506.46,4678.07 h80
  text "Y限位" at 3961.46,4678.17 h80 r1
  text "激光" at 6809.86,4188.07 h80
  text "X轴" at 1819.06,4178.07 h80 r359
  text "电源输入" at 6802.66,3793.07 h80
  text "细分" at 1794.66,3778.07 h80
  text "SD卡" at 1769.06,3188.07 h80 r358
  text "热床" at 6816.46,3058.07 h80
  text "USB" at 1746.46,2713.07 h80
  text "喷嘴" at 6811.46,2673.07 h80
  text "热敏1" at 4491.46,1773.67 h80
  text "对刀" at 5181.46,1774.17 h80 r357
  text "舵机" at 3531.46,1768.67 h80
  text "热敏0" at 4826.46,1768.67 h80
  text "5V降压" at 3096.46,1768.07 h80
  text "电源输出" at 5481.46,1768.07 h80
  text "I2C" at 3976.46,1722.56 h80

## Text inside footprints (layer, text, board x,y; h text height)
U3: Top Overlay "Vin" at 2483.01,3206.89 h40 r243; Top Overlay "P13" at 2882.83,3197.81 h40 r270; Top Overlay "SD2" at 2784.83,3197.81 h40 r270; Top Overlay "SD3" at 2683.83,3197.81 h40 r270; Top Overlay "CMD" at 2584.83,3197.81 h40 r270; Top Overlay "P35" at 3779.83,3197.81 h40 r270; Top Overlay "P32" at 3682.83,3197.81 h40 r270; Top Overlay "P27" at 3279.83,3197.81 h40 r270; Top Overlay "GND" at 2980.83,3197.81 h40 r270; Top Overlay "P26" at 3379.83,3197.81 h40 r270; Top Overlay "P25" at 3475.83,3197.81 h40 r270; Top Overlay "P33" at 3578.83,3197.81 h40 r270; Top Overlay "P12" at 3086.83,3197.81 h40 r270; Top Overlay "P14" at 3186.83,3197.81 h40 r270; Top Overlay "P34" at 3880.83,3197.81 h40 r270; Top Overlay "SVN" at 3980.83,3197.81 h40 r270; Top Overlay "SVP" at 4081.83,3197.81 h40 r270; Top Overlay "EN" at 4180.83,3197.81 h40 r270; Top Overlay "3.3V" at 4281.83,3197.81 h40 r270; Top Overlay "P15" at 2777.83,2478.61 h40 r270; Top Overlay "GND" at 4279.83,2496.81 h40 r270; Top Overlay "P23" at 4177.83,2495.01 h40 r270; Top Overlay "P22" at 4080.83,2495.01 h40 r270; Top Overlay "TX" at 3978.83,2457.51 h40 r270; Top Overlay "RX" at 3884.83,2457.51 h40 r270; Top Overlay "P21" at 3785.83,2478.61 h40 r270; Top Overlay "GND" at 3685.83,2496.81 h40 r270; Top Overlay "P19" at 3579.83,2476.81 h40 r270; Top Overlay "P18" at 3481.83,2478.61 h40 r270; Top Overlay "P5" at 3379.83,2457.51 h40 r270; Top Overlay "P17" at 3280.83,2478.61 h40 r270; Top Overlay "P16" at 3179.83,2476.81 h40 r270; Top Overlay "P4" at 3080.83,2459.31 h40 r270; Top Overlay "P0" at 2979.83,2457.51 h40 r270; Top Overlay "P2" at 2880.83,2457.51 h40 r270; Top Overlay "SD1" at 2685.83,2478.81 h40 r270; Top Overlay "SD0" at 2585.83,2495.21 h40 r270; Top Overlay "CLK" at 2482.83,2493.31 h40 r270
U6: Bottom Overlay "SDA" at 4461.46,2881.81 h80; Bottom Overlay "SCL" at 4451.36,2781.81 h80; Bottom Overlay "VCC" at 4453.16,2676.81 h80; Bottom Overlay "GND" at 4474.66,2566.81 h80 r359
U7: Top Overlay "MS1" at 2646.46,3511.81 h40 r90; Top Overlay "MS2" at 2746.46,3511.81 h40 r90; Top Overlay "MS3" at 2846.46,3511.81 h40 r90; Top Overlay "STEP" at 3146.46,3511.81 h40 r90; Top Overlay "DIR" at 3246.46,3511.81 h40 r90; Top Overlay "GND" at 3246.46,3821.81 h40 r90; Top Overlay "VDD" at 3146.46,3821.81 h40 r90; Top Overlay "1B" at 3046.46,3821.81 h40 r90; Top Overlay "1A" at 2931.97,3802.59 h40 r16; Top Overlay "2A" at 2846.46,3821.81 h40 r90; Top Overlay "2B" at 2746.46,3821.81 h40 r90; Top Overlay "GND" at 2646.46,3821.81 h40 r90; Top Overlay "VMOT" at 2546.46,3781.81 h40 r90; Top Overlay "EN" at 2546.46,3511.81 h40 r90; Top Overlay "RST" at 2946.46,3511.81 h40 r90; Top Overlay "SLP" at 3046.46,3511.81 h40 r90
U8: Top Overlay "MS1" at 3446.46,3511.81 h40 r90; Top Overlay "MS2" at 3546.46,3511.81 h40 r90; Top Overlay "MS3" at 3646.46,3511.81 h40 r90; Top Overlay "STEP" at 3946.46,3511.81 h40 r90; Top Overlay "DIR" at 4046.46,3511.81 h40 r90; Top Overlay "GND" at 4046.46,3821.81 h40 r90; Top Overlay "VDD" at 3946.46,3821.81 h40 r90; Top Overlay "1B" at 3846.46,3821.81 h40 r90; Top Overlay "1A" at 3731.97,3802.59 h40 r16; Top Overlay "2A" at 3646.46,3821.81 h40 r90; Top Overlay "2B" at 3546.46,3821.81 h40 r90; Top Overlay "GND" at 3446.46,3821.81 h40 r90; Top Overlay "VMOT" at 3346.46,3781.81 h40 r90; Top Overlay "EN" at 3346.46,3511.81 h40 r90; Top Overlay "RST" at 3746.46,3511.81 h40 r90; Top Overlay "SLP" at 3846.46,3511.81 h40 r90
U9: Top Overlay "MS1" at 4246.46,3511.81 h40 r90; Top Overlay "MS2" at 4346.46,3511.81 h40 r90; Top Overlay "MS3" at 4446.46,3511.81 h40 r90; Top Overlay "STEP" at 4746.46,3511.81 h40 r90; Top Overlay "DIR" at 4846.46,3511.81 h40 r90; Top Overlay "GND" at 4846.46,3821.81 h40 r90; Top Overlay "VDD" at 4746.46,3821.81 h40 r90; Top Overlay "1B" at 4646.46,3821.81 h40 r90; Top Overlay "1A" at 4531.97,3802.59 h40 r16; Top Overlay "2A" at 4446.46,3821.81 h40 r90; Top Overlay "2B" at 4346.46,3821.81 h40 r90; Top Overlay "GND" at 4246.46,3821.81 h40 r90; Top Overlay "VMOT" at 4146.46,3781.81 h40 r90; Top Overlay "EN" at 4146.46,3511.81 h40 r90; Top Overlay "RST" at 4546.46,3511.81 h40 r90; Top Overlay "SLP" at 4646.46,3511.81 h40 r90
U10: Top Overlay "MS1" at 5046.46,3511.81 h40 r90; Top Overlay "MS2" at 5146.46,3511.81 h40 r90; Top Overlay "MS3" at 5246.46,3511.81 h40 r90; Top Overlay "STEP" at 5546.46,3511.81 h40 r90; Top Overlay "DIR" at 5646.46,3511.81 h40 r90; Top Overlay "GND" at 5646.46,3821.81 h40 r90; Top Overlay "VDD" at 5546.46,3821.81 h40 r90; Top Overlay "1B" at 5446.46,3821.81 h40 r90; Top Overlay "1A" at 5331.97,3802.59 h40 r16; Top Overlay "2A" at 5246.46,3821.81 h40 r90; Top Overlay "2B" at 5146.46,3821.81 h40 r90; Top Overlay "GND" at 5046.46,3821.81 h40 r90; Top Overlay "VMOT" at 4946.46,3781.81 h40 r90; Top Overlay "EN" at 4946.46,3511.81 h40 r90; Top Overlay "RST" at 5346.46,3511.81 h40 r90; Top Overlay "SLP" at 5446.46,3511.81 h40 r90